# Altium PCB ICM模块.PcbDoc
Units mil, origin at the board's own origin, x right, y up, seen from the top; angles counter-clockwise.
Board outline 1129.81 x 1114.85 mil, 2 copper layers (Top Layer, Bottom Layer); 19 components, 16 nets, 65 pads, 8 vias.
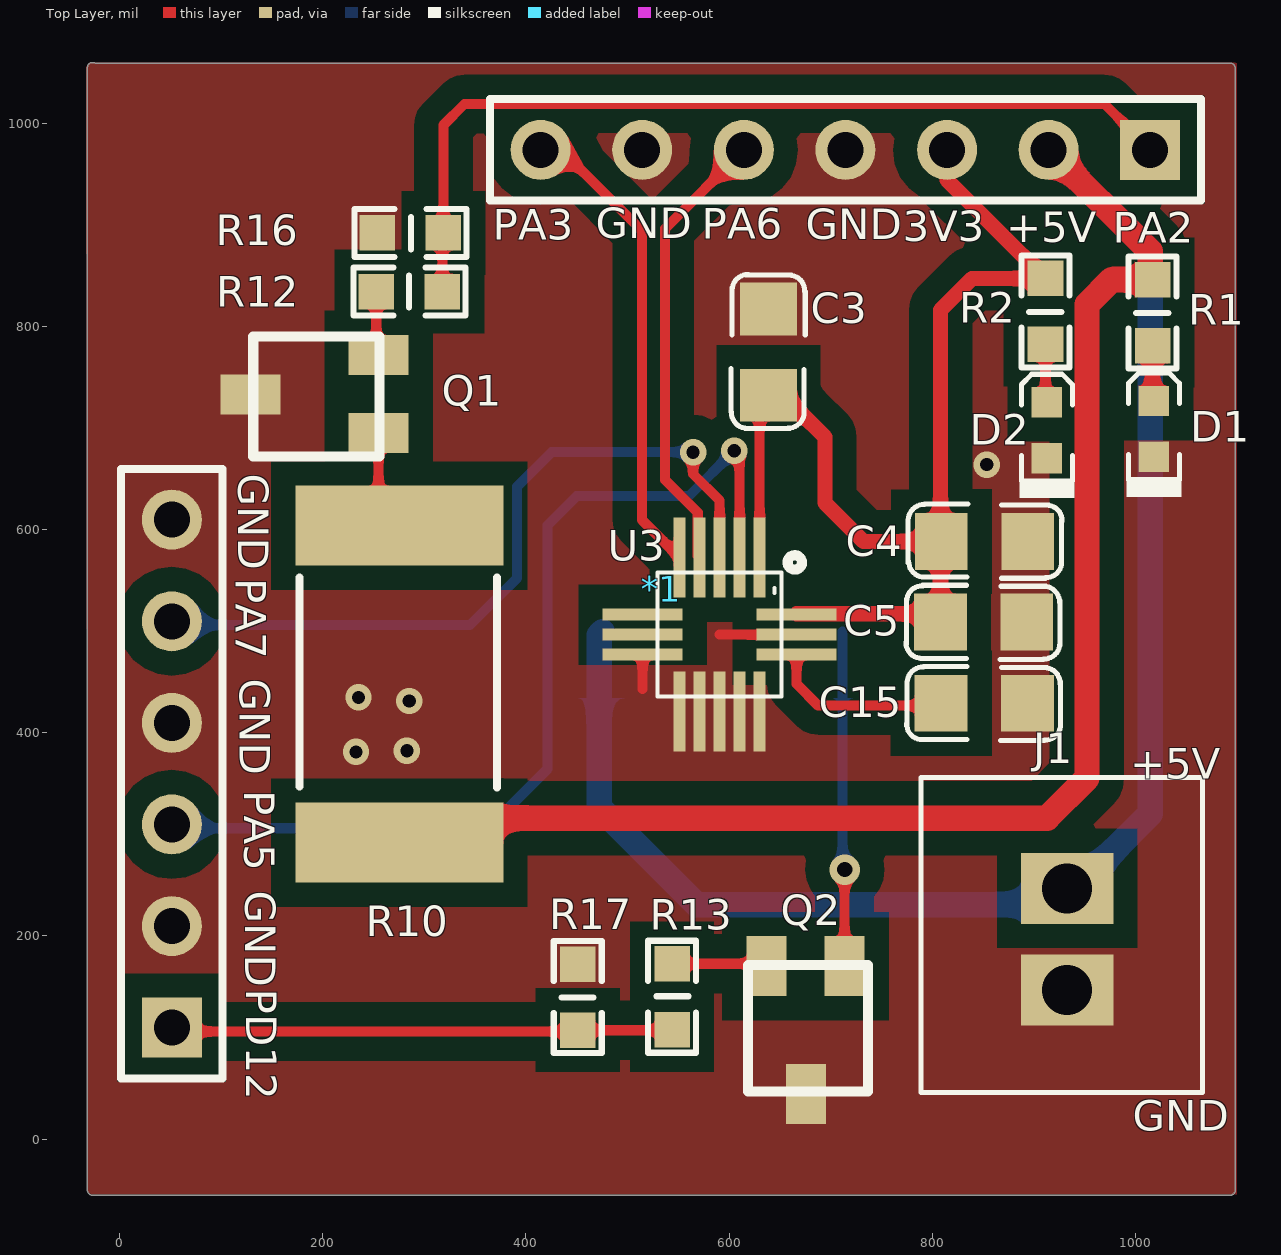
[diagram p0: Top Layer view]
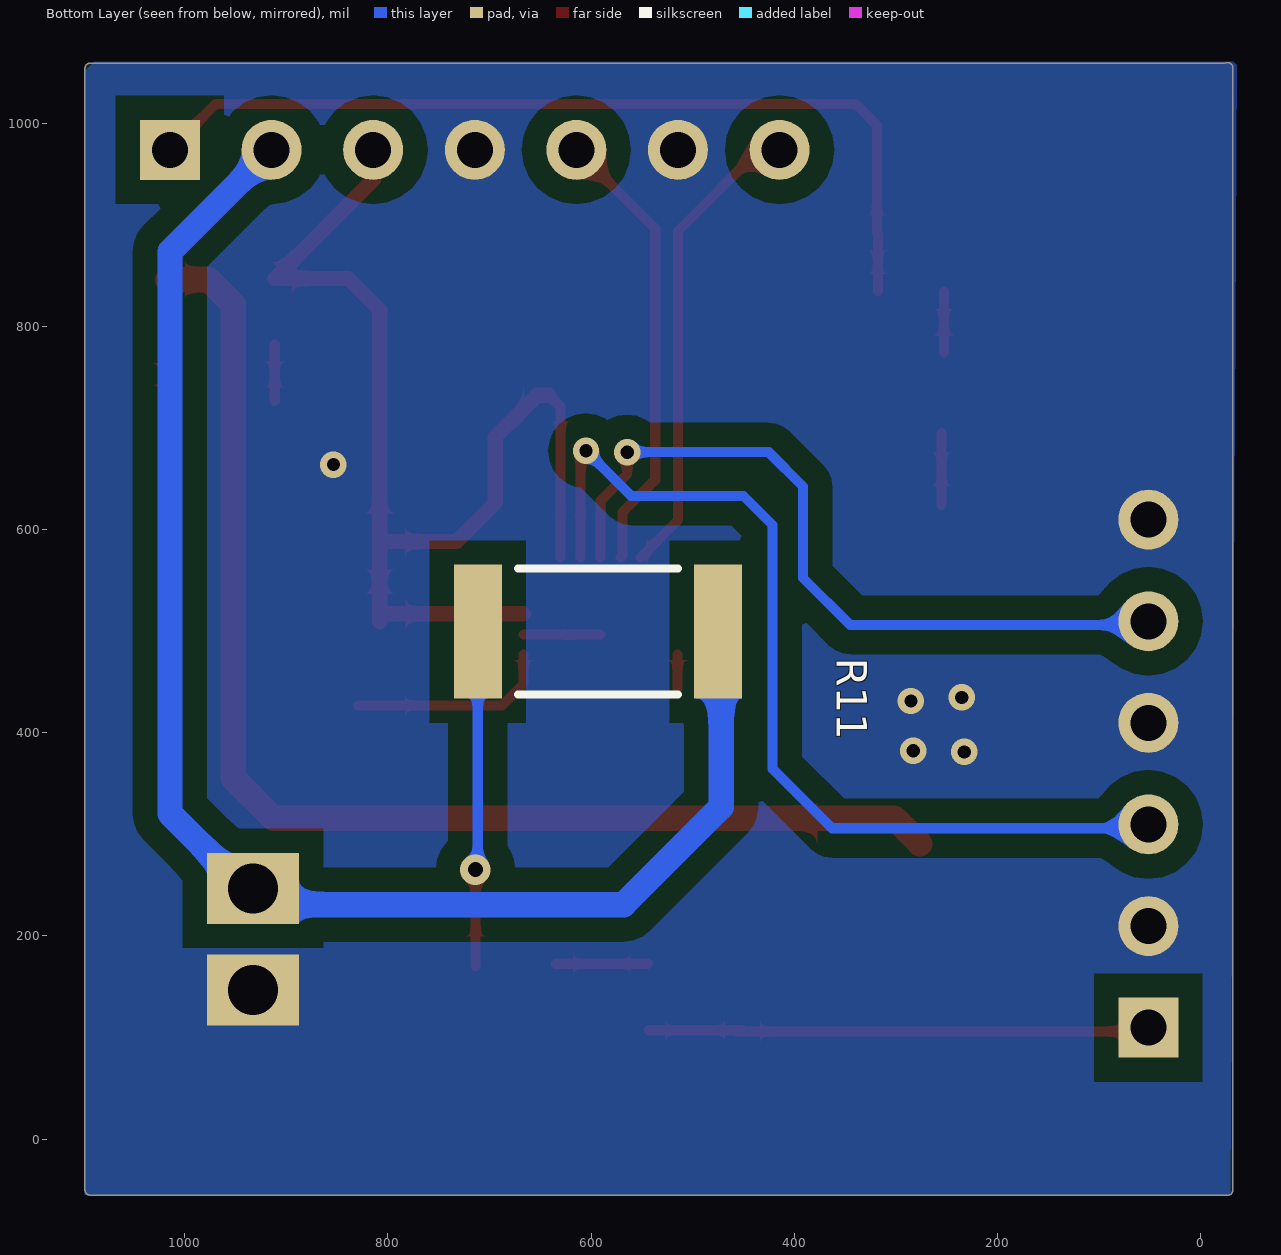
[diagram p1: Bottom Layer view, seen from below]
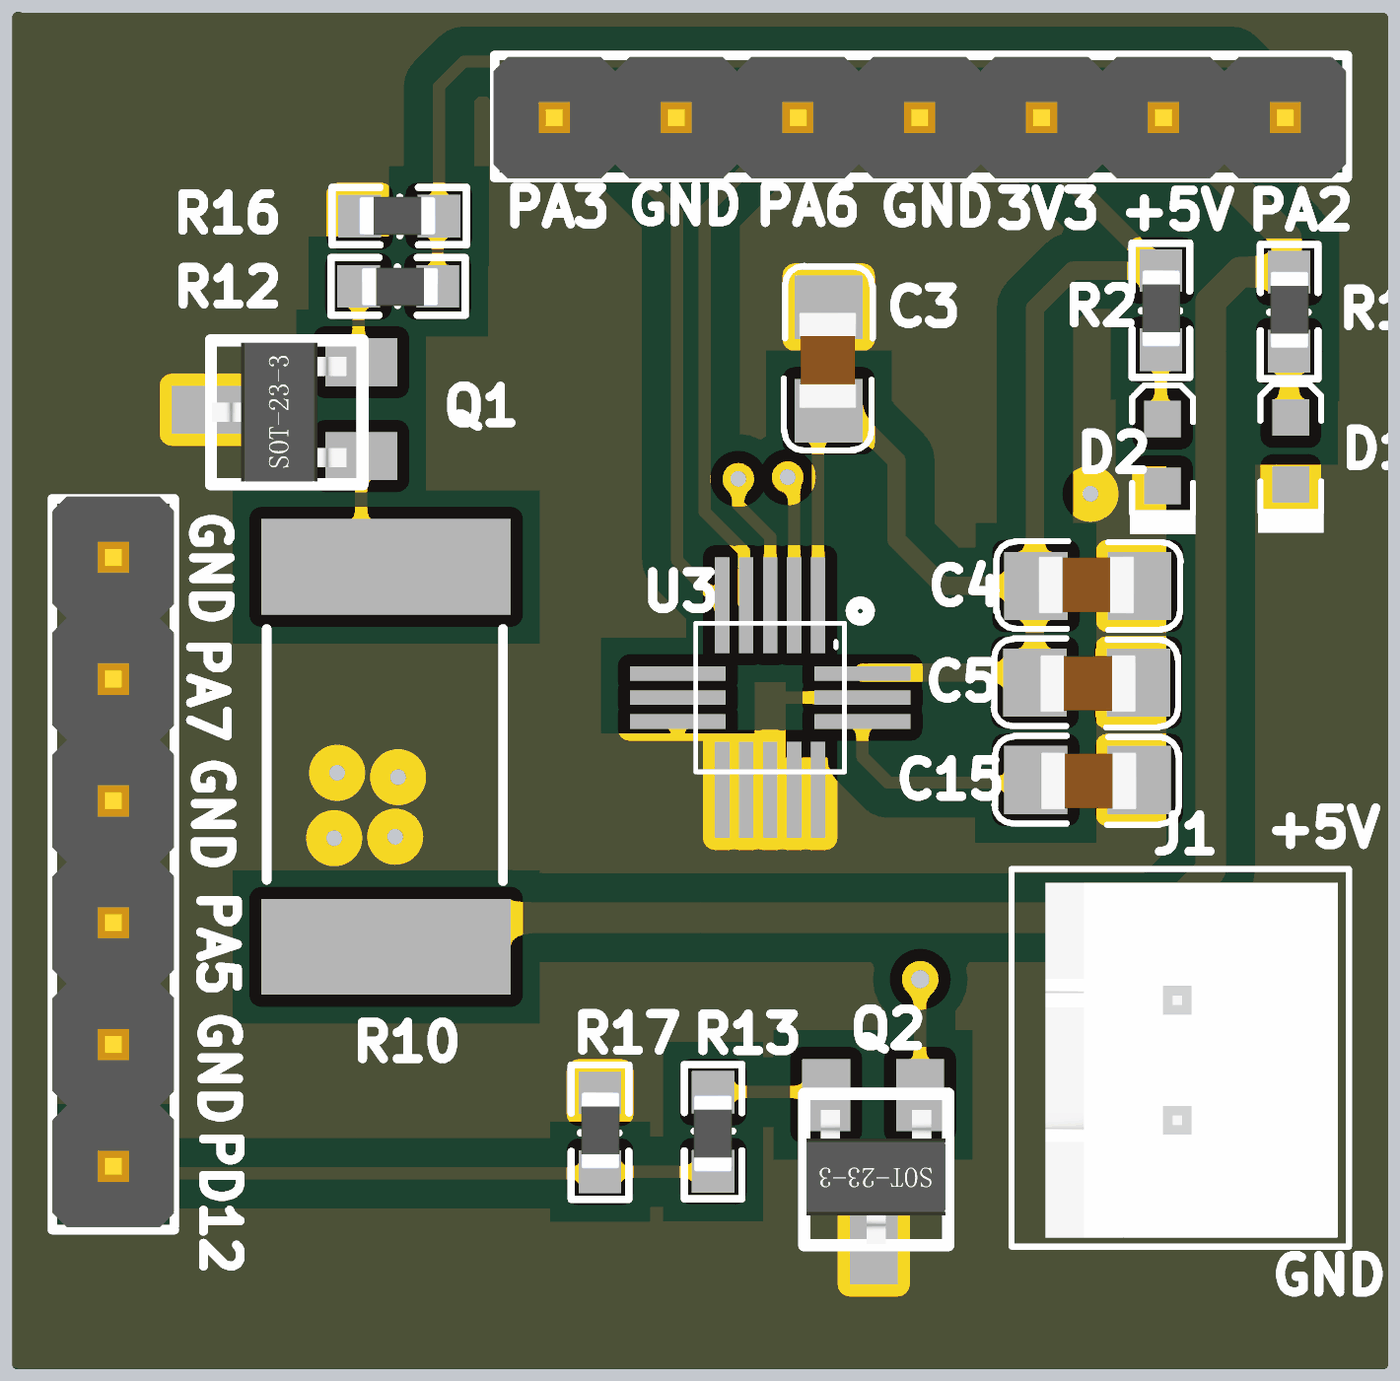
[diagram p2: 3D render of the assembled board from above, using the file's embedded part models]

## Layer stack, top to bottom
Top Solder: solder mask 0.4, Solder Resist, Dk 3.5
Top Layer: signal copper 1.4
Dielectric 1: dielectric 12.6, FR-4, Dk 4.8
Bottom Layer: signal copper 1.4
Bottom Solder: solder mask 0.4, Solder Resist, Dk 3.5

## Board outline
-31.54,-50.28 ccw(c-26.52,-50.28) -26.52,-55.29 1093.25,-55.29 ccw(c1093.25,-50.28) 1098.27,-50.28 1098.27,1053.91 ccw(c1093.25,1053.91) 1093.25,1058.93 -24.09,1058.93 ccw(c-26.52,1054.54) -31.54,1054.54

## Design rules (kind name [scope] priority, off if disabled: settings)
Clearance [All] p1: gap=7
HoleToHoleClearance [All] p1: gap=0 allowstackedmicrovias=TRUE
PlaneClearance [All] p1: clearance=24
PlaneConnect [All] p1: planeconnectstyle=Direct reliefexpansion=20 reliefentries=4 reliefconductorwidth=10 reliefairgap=10
PolygonConnect [All] p1: connectstyle=Direct reliefconductorwidth=10 reliefentries=4 polygonreliefangle="90 Angle" airgapwidth=10
RoutingVias [All] p1: holewidth=28 width=50 viastyle="Through Hole" minholewidth=11 minwidth=26 maxholewidth=28 maxwidth=50
SilkToSilkClearance [All] p1: silktosilkclearance=0
SilkToSolderMaskClearance [IsPad] p1: minsilkscreentomaskgap=0 clearancetoexposedcopper=TRUE
SolderMaskExpansion [All] p1: expansion=10
Width [All] p1: maxlimit=30 minlimit=10 preferedwidth=10
25 further rules are at their usual default settings.

## Classes and differential pairs
component class icm模块: C3 C4 C5 C15 D1 D2 J1 Q1 Q2 R1 R2 R10 R11 R12 R13 R16 R17 U3

## Components (designator, comment, footprint, x,y, rotation, side; value= is the part's Value field where it differs from the comment)
*1 "mems小板底座" mems小板底座 14.57,873.66 r180 top
C3 "103" C-0805C 599.99,696.42 r90 top
C4 "104" C-0805C 773.36,627.02 r0 top
C5 "2.2uf" C-0805C 928.69,470.1 r180 top
C15 "0.47uf" C-0805C 929.32,390.1 r180 top
D1 "" D-0603D 1018.17,698.94 r0 top (schematic designator LD1)
D2 "" D-0603D 912.9,697.75 r0 top (schematic designator LD2)
J1 "J-2PIN" J-2-2.54-xh 929.86,93.74 r90 top
Q1 "S8050" SOT-233-3 234.06,722.86 r90 top
Q2 "S8050" SOT-233-3 685.76,149.24 r180 top
R1 "1K" R-0603R 1041.84,870.91 r270 top
R2 "510R" R-0603R 936.46,872.1 r270 top
R10 "30欧 2512" R-3925R（锰铜） 282.48,454.83 r270 top
R11 "30欧 2512" PCBComponent_1 587,494.28 r0 bottom
R12 "330欧" R-0603R 342.84,809.08 r180 top
R13 "330欧" R-0603R 518.97,82.6 r90 top
R16 "10K" R-0603R 228.81,916.83 r0 top
R17 "10K" R-0603R 476.12,197.17 r270 top
U3 "ICM-20608-G" ICM20608-G 590.75,496.53 r270 top

## Footprints (in the part's own frame and the unit in brackets; to place one, negate y for a bottom-side part, rotate by r counter-clockwise, add the part's x,y. Pads: shape width x height; smd on the part's side, far side on the other; paste and mask are expansions set on the pad)
C-0805C [mil]
  rect 52x56 smd: 1(35.6,-38.84) 2(120.6,-38.84)
  silkscreen extent 3,-75 155,-2, body extent 38,-62 116,-14, height 37
D-0603D [mil]
  rect 30x30 smd: 1(0,27.5) 2(0,-27.5)
  silkscreen extent -27,-67 27,55, body extent -15,-39 15,38, height 12
ICM20608-G [mm]
  rect 2x0.3 smd: 1(-1.925,1) 2(-1.925,0.5) 3(-1.925,0) 4(-1.925,-0.5) 5(-1.925,-1) 9(1.925,-1) 10(1.925,-0.5) 11(1.925,0) 12(1.925,0.5) 13(1.925,1)
  rect 0.3x2 smd: 6(-0.5,-1.925) 7(0,-1.925) 8(0.5,-1.925) 14(0.5,1.925) 15(0,1.925) 16(-0.5,1.925)
  silkscreen extent -1.98,-1.55 1.55,2.06
J-2-2.54-xh [mil]
  rect 70x90.75 hole 49.21: 1(53,-3) 2(153,-3)
  silkscreen extent -48,-136 262,141, body extent -41,-127 251,113, height 280
mems小板底座 [mm]
  rect 1.5x1.5 hole 0.9: 1(-25.4,-2.54) 13(-0.94,19.406)
  round 1.5 hole 0.9: 2(-22.86,-2.54) 3(-20.32,-2.54) 4(-17.78,-2.54) 5(-15.24,-2.54) 6(-12.7,-2.54) 7(-10.16,-2.54) 8(-0.94,6.706) 9(-0.94,9.246) 10(-0.94,11.786) 11(-0.94,14.326) 12(-0.94,16.866)
  silkscreen extent -26.67,-3.81 0.33,20.68, body extent -26.64,-3.78 0.33,20.62, height 10.1
PCBComponent_1 [mm]
  rect 1.2x3.35 smd: 1(3.166,-0.132) 2(-2.834,-0.132)
  silkscreen extent -1.83,-1.71 2.17,1.44, body extent -3.01,-1.74 3.34,1.48, height 0.65
R-0603R [mil]
  rect 35x35 smd: 1(25,-25) 2(90,-25)
  silkscreen extent 2,-49 113,-1, body extent 25,-40 87,-9, height 15
R-3925R（锰铜） [mil]
  rect 78.74x204.72 smd: 1(-149,-7) 2(163,-7)
  silkscreen extent -98,-105 109,89, body extent -138,-102 175,89, height 15
SOT-233-3 [mil]
  rect 39.37x59.06 smd: 1(-28,-21) 2(49,-21) 3(10,105)
  silkscreen extent -51,-22 67,102, body extent -49,-9 65,101, height 47

## Part data
C3 C5 C15: library part C-贴片电容, "Capacitor"
C4: library part Cap, "Capacitor"
D1 D2: library part LED
J1: "SOCKET"
Q1 Q2: library part NPN, "NPN Bipolar Transistor"
R1 R2: library part Resistor, "RES, 10K, 5%, 0.1 W, 0603"
R10 R11 R12 R13 R16 R17: library part "Res Semi", "Semiconductor Resistor"

## Via types
v1: diameter 26, hole 13, Top Layer to Bottom Layer, 7 vias
v2: diameter 30, hole 15, Top Layer to Bottom Layer, 1 vias

## Nets (pads, with @x,y where several pads share a name; then routed paths per layer and width w, separated by ;. In a path a pad name is that pad's centre, name@x,y a point inside that pad or via, vN(x,y) a via of type N, cw(c..) or ccw(c..) an arc to the next point about the centre after c; other vN are vias at no path point)
3V3: *1.3 C3.1 C4.1 C5.2 R2.1 U3.1 U3.16 | length 1153.9
  Top Layer w10: U3.1 630.12,720.57 C3.1@641.57,732.02
  Top Layer w15: C3.1@641.57,732.02 653.49,732.02 694.42,691.09 694.42,626.18 732.42,588.18 C4.1@808.09,588.18 ; U3.16@666.54,516.93 C5.2@801.84,516.93 ; C5.2 C4.1@808.09,588.18 ; *1.3 814.57,943.98 R2.1 839.08,847.1 808.09,816.11 C4.1@808.09,588.18
+5V_OUT: *1.2 J1.2 R1.1 R10.2 R11.2 | length 2898.8
  Top Layer w25: R10.2@276.47,290.83 301.53,315.89 913.09,315.89 952.29,355.1 952.29,821.51 976.69,845.91 R1.1 ; *1.2 1014.57,873.66 R1.1@1014.57,848.17
  Bottom Layer w25: R11.2 472.1,496.16 472.1,326.7 568.11,230.7 925.12,230.7 1014.57,320.15 1014.57,873.66 *1.2
GND: *1.4 *1.6 *1.8 *1.10 *1.12 C3.2 C4.2 C5.1 C15.1 D1.2 D2.2 J1.1 Q1.3 Q2.3 R16.1 R17.1 U3.8 U3.9 U3.10 U3.11 U3.12 U3.13 U3.15 | length 109.7
  Top Layer w10: 514.96,442.84 U3.8 ; 590.86,496.53 U3.15
  other v1: 232.88,381.09 282.95,382.28 285.35,431.17 235.28,434.74 853.71,663.88
NetC15_2: C15.2 U3.14 | length 200.7
  Top Layer w10: U3.14 666.54,447.86 687.77,426.63 C15.2@829.42,426.63
NetLD1_1: D1.1 R1.2 | length 53.1
  Top Layer w15: D1.1@1016.84,727.77 R1.2
NetLD2_1: D2.1 R2.2 | length 55.4
  Top Layer w10: D2.1@911.46,726.69 R2.2
NetQ1_1: Q1.1 R10.1 | length 70.6
  Top Layer w10: R10.1@255.06,624.24 Q1.1
NetQ1_2: Q1.2 R12.2 | length 60
  Top Layer w10: Q1.2@252.84,774.09 R12.2
NetQ2_1: Q2.1 R11.1 | length 329.3
  Top Layer w10: Q2.1 713.76,264.99 v2(713.97,265.2)
  Bottom Layer w10: v2@711.64,265.2 R11.1
NetQ2_2: Q2.2 R13.2 | length 90.4
  Top Layer w10: R13.2 Q2.2@634.4,172.6
PA2: *1.1 R12.1 R16.2 | length 885.9
  Top Layer w10: R12.1 R16.2@317.84,890.86 ; R16.2 318.81,997.96 339.58,1018.73 969.5,1018.73 *1.1
PA3: *1.7 U3.5 | length 469.8
  Top Layer w10: *1.7 434.64,973.66 514.48,893.81 514.48,609.21 U3.5
PA5: *1.11 U3.2 | length 972.5
  Top Layer w10: v1(605.12,677.47) 610.37,677.47 610.43,677.41 U3.2
  Bottom Layer w10: *1.11@41.08,305.9 362.92,305.9 421.47,364.45 421.47,604.43 450.04,633 560.64,633 v1(605.12,677.47) v1@608.7,677.47
PA6: *1.5 U3.4 | length 447.6
  Top Layer w10: U3.4 569.28,574.09 569.28,616.65 536.95,648.98 536.95,896.04 *1.5
PA7: *1.9 U3.3 | length 761.3
  Top Layer w10: v1(564.6,676.1) 564.6,654.67 590.75,628.52 U3.3
  Bottom Layer w10: *1.9@41.08,505.9 345.09,505.9 391.46,552.28 391.46,642.27 425.29,676.1 v1(564.6,676.1)
PD12: *1.13 R13.1 R17.2 | length 508.6
  Top Layer w10: *1.13@41.08,105.9 R17.2@457.27,105.9 ; R17.2 R13.1@543.54,107.17
pads on no net: U3.6 U3.7

## Polygon pours and split planes (outlines as drawn)
GND on Top Layer "Top Layer-No Net" (solid, remove dead copper, pour order 8): -32.51,1059.18 1098.49,1059.18 1099.58,1060.28 1099.58,-54.3 -27.04,-54.3 -31.41,-58.67
GND on Bottom Layer "Top Layer-No Net" (solid, remove dead copper, pour order 12): -35.27,1060.49 1089.29,1060.49 1092.42,1057.36 1098.66,1051.11 1098.66,-54.71 -25.92,-54.71 -29.03,-57.82

## Silkscreen, mask and mechanical layers (free items; w line width, h text height)
Top Overlay:
  text "GND" at 468.86,886.6 h30
  text "PA6" at 573.15,886.09 h30
  text "GND" at 675.36,885.57 h30
  text "PA3" at 367.46,884.93 h30
  text "3V3" at 770.84,883.54 h30
  text "+5V" at 872.8,882.6 h30
  text "PA2" at 977.55,882.27 h30
  text "GND" at 116.91,655.01 h30 r270
  text "PA7" at 114.53,551.76 h30 r270
  text "GND" at 118.39,453.23 h30 r270
  text "+5V" at 994.76,354.84 h30
  text "PA5" at 122.81,343.4 h30 r270
  text "GND" at 123.84,244.42 h30 r270
  text "PD12" at 125.06,147.86 h30 r270
  text "GND" at 997.41,7.95 h30